# Altium PCB Keyboard_IDC10.PcbDoc
Units mm, origin at the board's own origin, x right, y up, seen from the top; angles counter-clockwise.
Board outline 29 x 16.25 mm, 2 copper layers (Top Layer, Bottom Layer); 3 components, 10 nets, 20 pads, 7 vias.
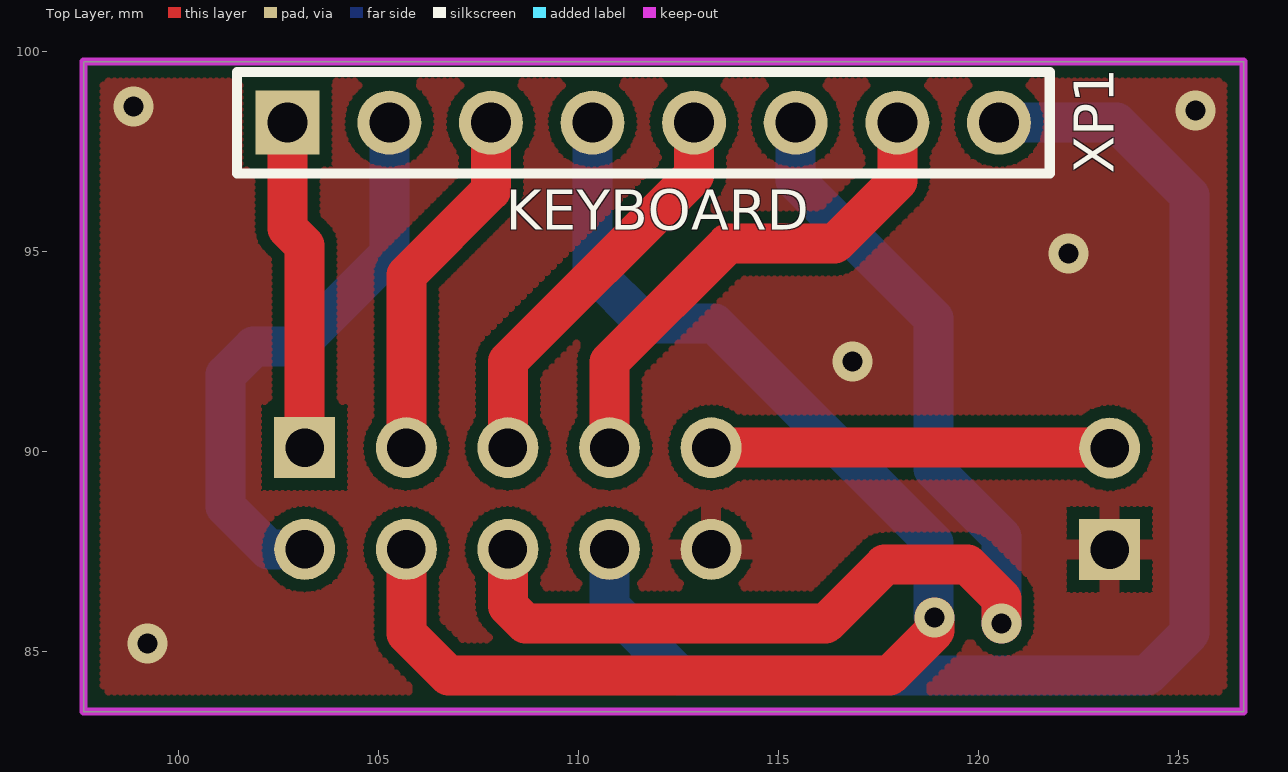
[diagram p0: Top Layer view]
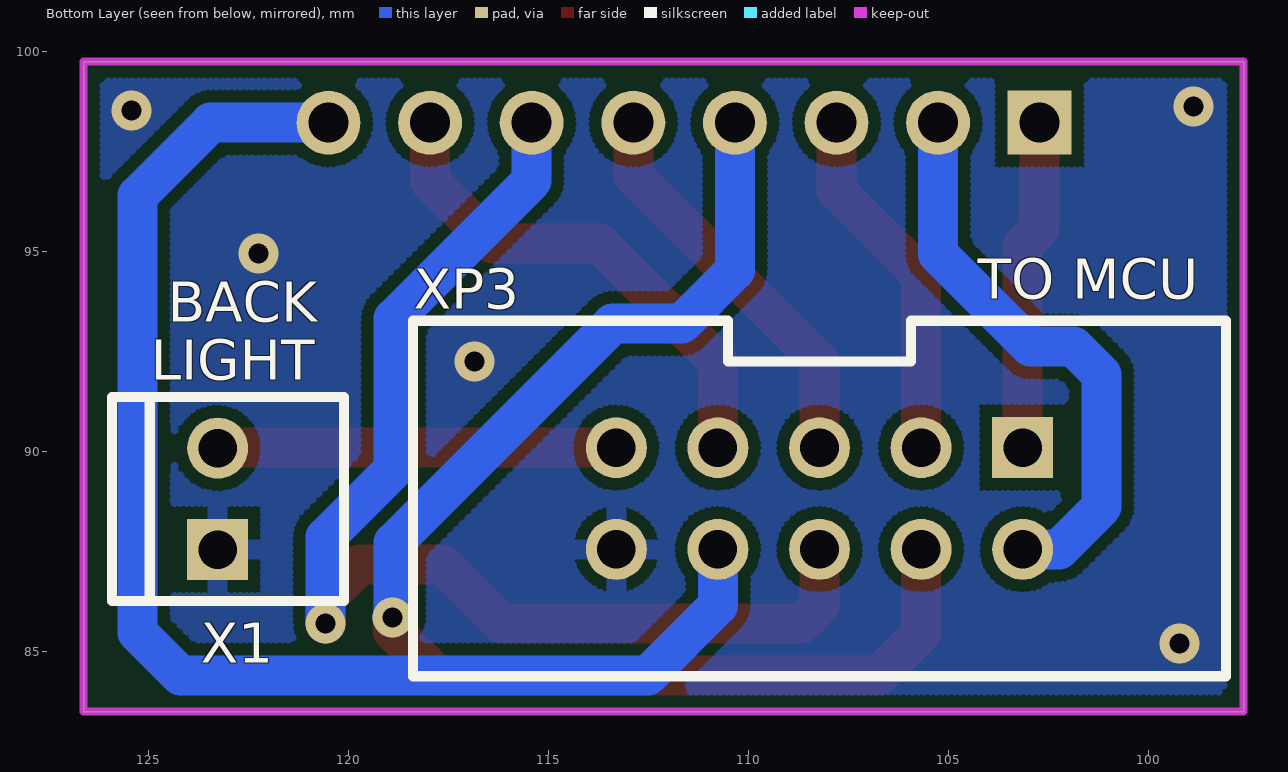
[diagram p1: Bottom Layer view, seen from below]

## Layer stack, top to bottom
Top Solder: solder mask 0.0102, Solder Resist, Dk 3.5
Top Layer: signal copper 0.0356
Dielectric 1: dielectric 0.32, FR-4, Dk 4.8
Bottom Layer: signal copper 0.0356
Bottom Solder: solder mask 0.0102, Solder Resist, Dk 3.5

## Board outline
97.625,83.5 126.625,83.5 126.625,99.75 97.625,99.75

## Design rules (kind name [scope] priority, off if disabled: settings)
Clearance [All] p1: gap=0.3
PolygonConnect PolygonConnect_1 [IsVia] p1: connectstyle=Direct reliefconductorwidth=0.254 reliefentries=4 polygonreliefangle="90 Angle" airgapwidth=0.254
PolygonConnect [All] p2: connectstyle=Relief reliefconductorwidth=0.5 reliefentries=4 polygonreliefangle="90 Angle" airgapwidth=0.3
RoutingVias [All] p1: holewidth=0.4 width=0.8 viastyle="Through Hole" minholewidth=0.3 minwidth=0.6 maxholewidth=0.5 maxwidth=1
SolderMaskExpansion [All] p1: expansion=0.102
Width [All] p1: maxlimit=3 minlimit=0.2 preferedwidth=0.5
30 further rules are at their usual default settings.

## Components (designator, comment, footprint, x,y, rotation, side; value= is the part's Value field where it differs from the comment)
X1 "WH-02" WH-02 123.275,87.55 r0 bottom
XP1 "PLS-08" PLS-08 102.725,98.225 r0 top
XP3 "BH-10" BH-10 103.15,90.1 r0 bottom

## Footprints (in the part's own frame and the unit in brackets; to place one, negate y for a bottom-side part, rotate by r counter-clockwise, add the part's x,y. Pads: shape width x height; smd on the part's side, far side on the other; paste and mask are expansions set on the pad)
BH-10 [mil]
  rect 60x60 hole 38: 1(0,0)
  round 60 hole 38: 2(0,100) 3(100,0) 4(100,100) 5(200,0) 6(200,100) 7(300,0) 8(300,100) 9(400,0) 10(400,100)
  silkscreen extent -200,-125 600,225
PLS-08 [mm]
  rect 1.6x1.6 hole 1: 1(0,0)
  round 1.6 hole 1: 2(2.54,0) 3(5.08,0) 4(7.62,0) 5(10.16,0) 6(12.7,0) 7(15.24,0) 8(17.78,0)
  silkscreen extent -1.27,-1.27 19.05,1.27
WH-02 [mil]
  rect 60x60 hole 38: 1(0,0)
  round 60 hole 38: 2(0,-100)
  silkscreen extent -124,-150 104,50

## Via types
v1: diameter 1, hole 0.5, Top Layer to Bottom Layer, 7 vias

## Nets (pads, with @x,y where several pads share a name; then routed paths per layer and width w, separated by ;. In a path a pad name is that pad's centre, name@x,y a point inside that pad or via, vN(x,y) a via of type N, cw(c..) or ccw(c..) an arc to the next point about the centre after c; other vN are vias at no path point)
GND: X1.1 XP3.10
  other v1: 99.225,85.2 116.85,92.25 122.25,94.95 125.425,98.525 98.875,98.625
NetX1_2: X1.2 XP3.9 | length 10
  Top Layer w1: XP3.9 123.265,90.1 X1.2
NetXP1_1: XP1.1 XP3.1 | length 8.3
  Top Layer w1: XP1.1 102.725,95.575 103.15,95.15 XP3.1
NetXP1_2: XP1.2 XP3.2 | length 14.3
  Bottom Layer w1: XP3.2 102.24,87.56 101.175,88.625 101.175,91.925 101.875,92.625 102.95,92.625 105.265,94.94 XP1.2
NetXP1_3: XP1.3 XP3.3 | length 9
  Top Layer w1: XP3.3 105.69,94.415 107.805,96.53 XP1.3
NetXP1_4: XP1.4 XP3.4 | length 33.5
  Top Layer w1: XP3.4 105.69,85.46 106.75,84.4 117.775,84.4 118.9,85.525 v1(118.9,85.85)
  Bottom Layer w1: XP1.4 110.345,94.53 111.675,93.2 113.4,93.2 118.875,87.725 118.875,85.875 v1(118.9,85.85)
NetXP1_5: XP1.5 XP3.5 | length 10.1
  Top Layer w1: XP3.5 108.23,92.255 112.885,96.91 XP1.5
NetXP1_6: XP1.6 XP3.6 | length 30.2
  Top Layer w1: XP3.6 108.23,86.145 108.675,85.7 116.175,85.7 117.65,87.175 119.725,87.175 120.575,86.325 v1(120.575,85.7)
  Bottom Layer w1: XP1.6 115.425,96.775 118.875,93.325 118.875,89.563 120.575,87.863 v1(120.575,85.7)
NetXP1_7: XP1.7 XP3.7 | length 12.7
  Top Layer w1: XP3.7 110.77,92.245 113.725,95.2 116.4,95.2 117.965,96.765 XP1.7
NetXP1_8: XP1.8 XP3.8 | length 33.5
  Bottom Layer w1: XP3.8 110.77,86.155 112.525,84.4 124.2,84.4 125.275,85.475 125.275,96.4 123.45,98.225 XP1.8

## Polygon pours and split planes (outlines as drawn)
GND on Top Layer "GND_L01_P000" (hatched 90Degree grid 0.15 track 0.2, remove dead copper, pour order 0): 97.625,99.75 126.625,99.75 126.625,83.5 97.625,83.5
GND on Bottom Layer "GND_L02_P002" (hatched 90Degree grid 0.15 track 0.2, remove dead copper, pour order 2): 97.625,99.75 126.625,99.75 126.625,83.5 97.625,83.5

## Keep-outs
Keep-Out Layer:
  lines w0.2: 97.625,83.5 126.625,83.5 126.625,99.75 97.625,99.75 97.625,92.375 97.625,83.5

## Silkscreen, mask and mechanical layers (free items; w line width, h text height)
Top Overlay:
  text "KEYBOARD" at 108.175,95.55 h1
Bottom Overlay:
  text "TO MCU" at 104.275,93.825 h1
  text "BACK" at 124.525,93.25 h1
  text "LIGHT" at 124.95,91.8 h1